# Altium PCB 2018.PcbDoc
Units mm, origin at the board's own origin, x right, y up, seen from the top; angles counter-clockwise.
Board outline 99 x 31 mm, 4 copper layers (Top Layer, Ground, Power, Bottom Layer), stack 0.558 mm thick; 49 components, 37 nets, 163 pads, 31 vias.
Unrouted connection lines stored in the file: 13.
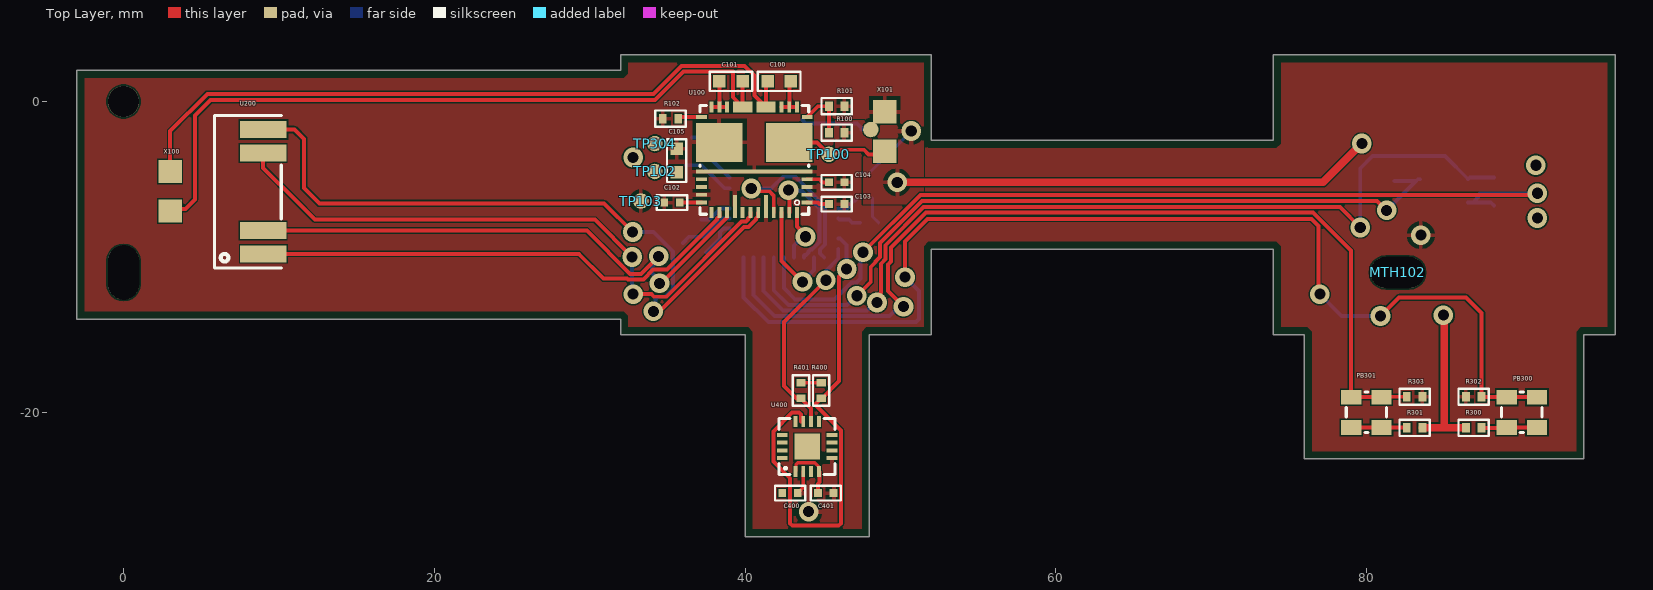
[diagram p0: Top Layer view]
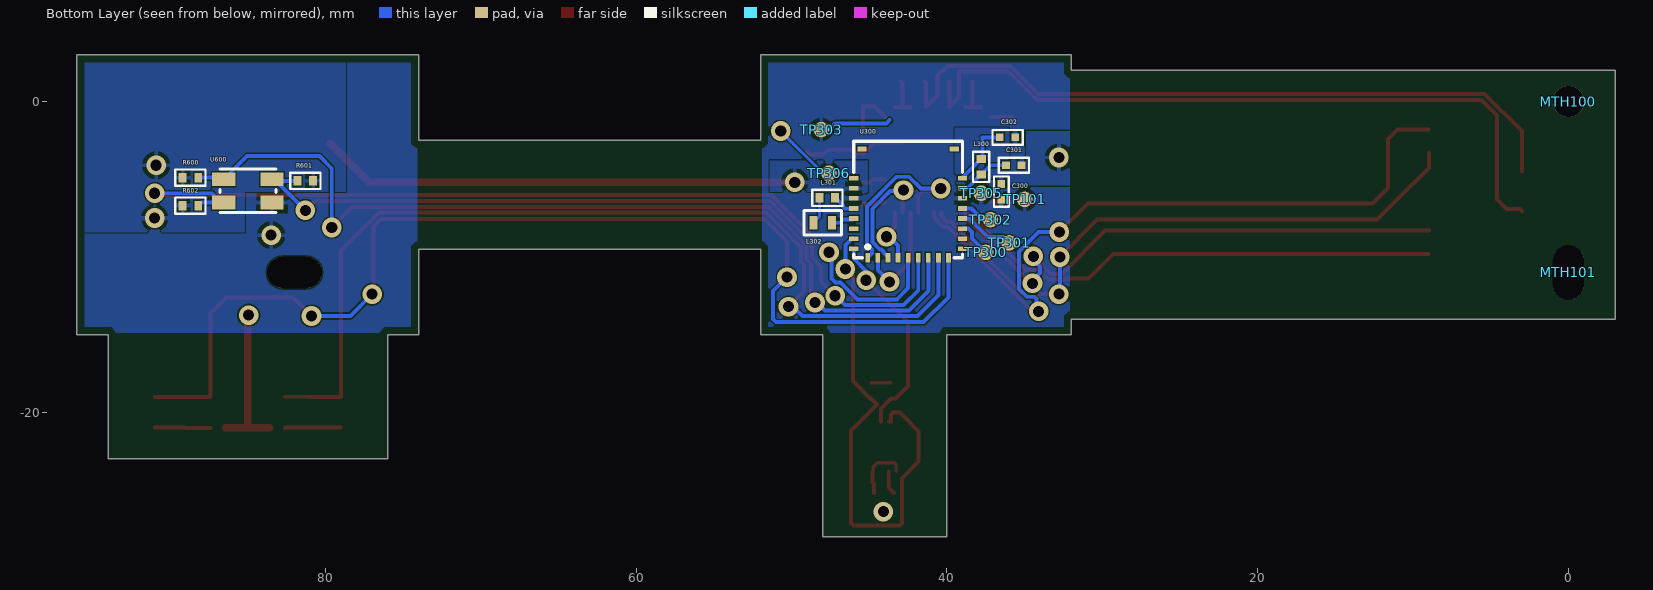
[diagram p1: Bottom Layer view, seen from below]
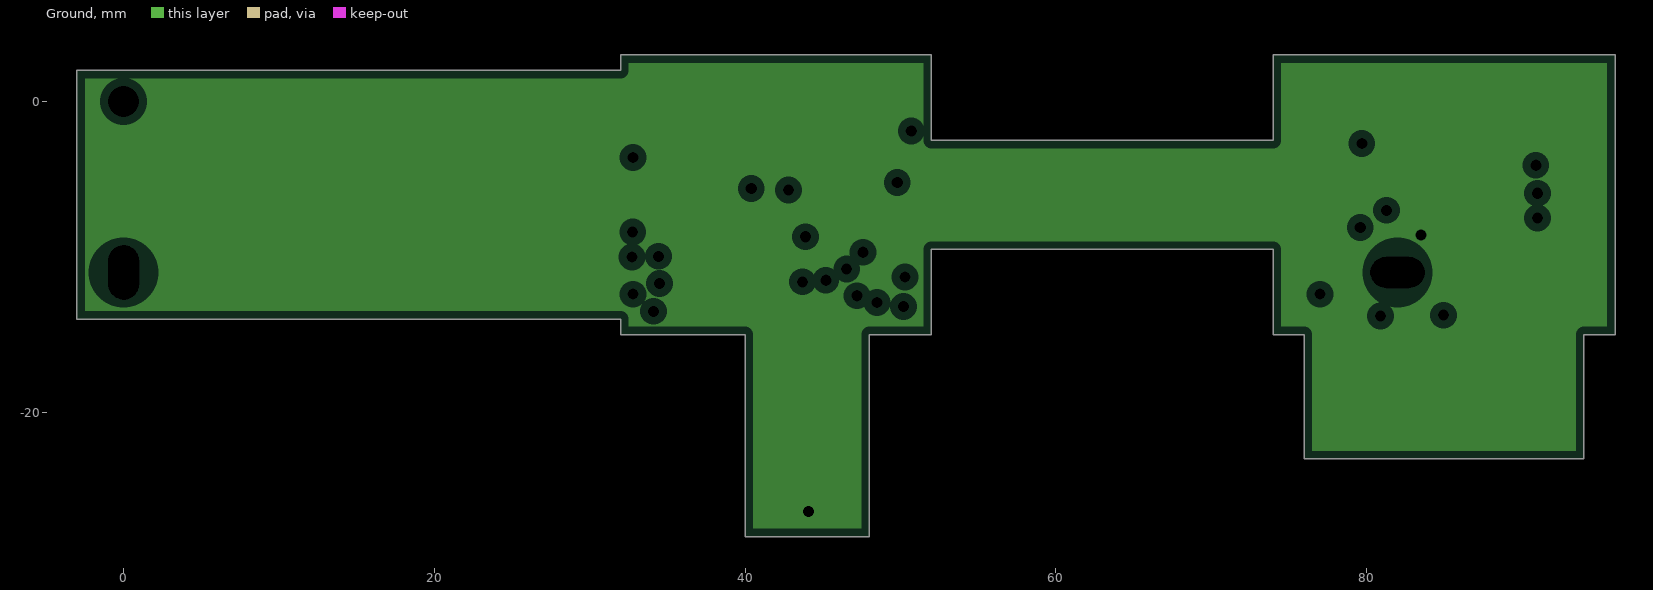
[diagram p2: Ground, clearances drawn from the general rule]
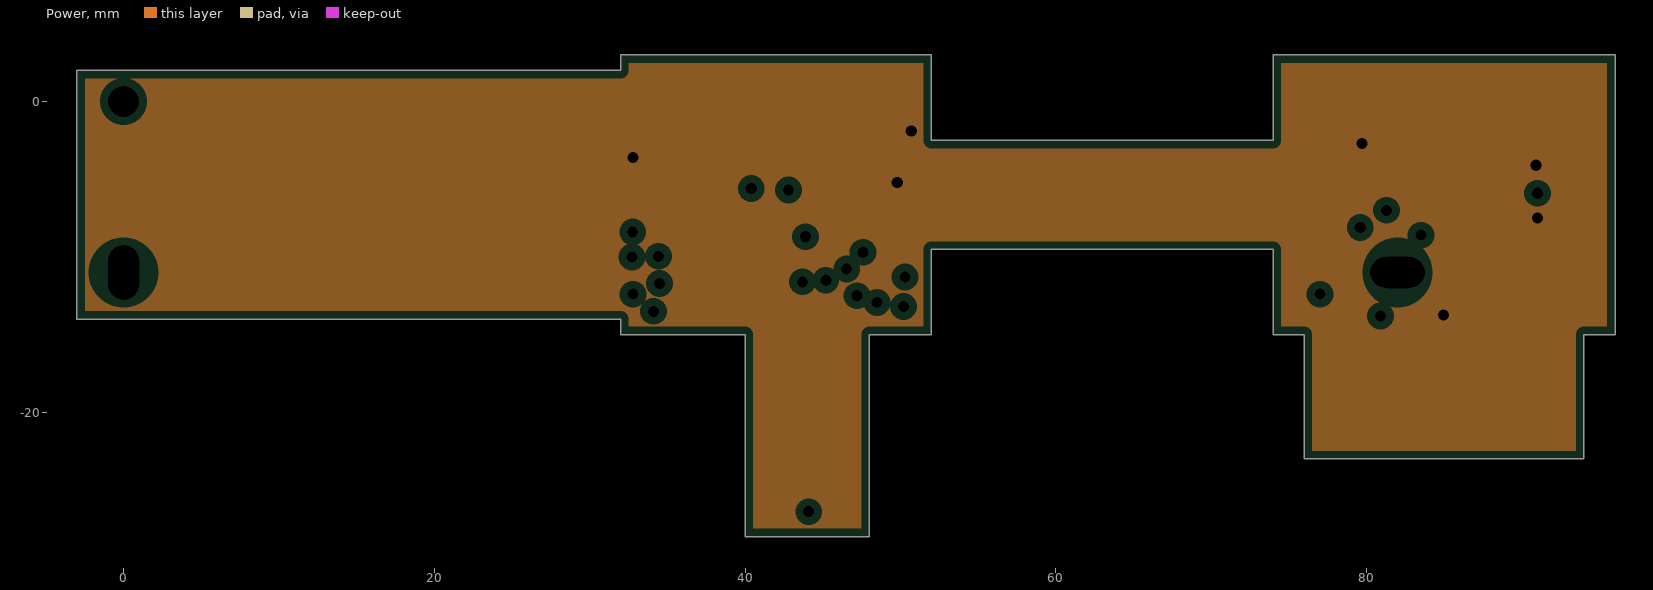
[diagram p3: Power, clearances drawn from the general rule]
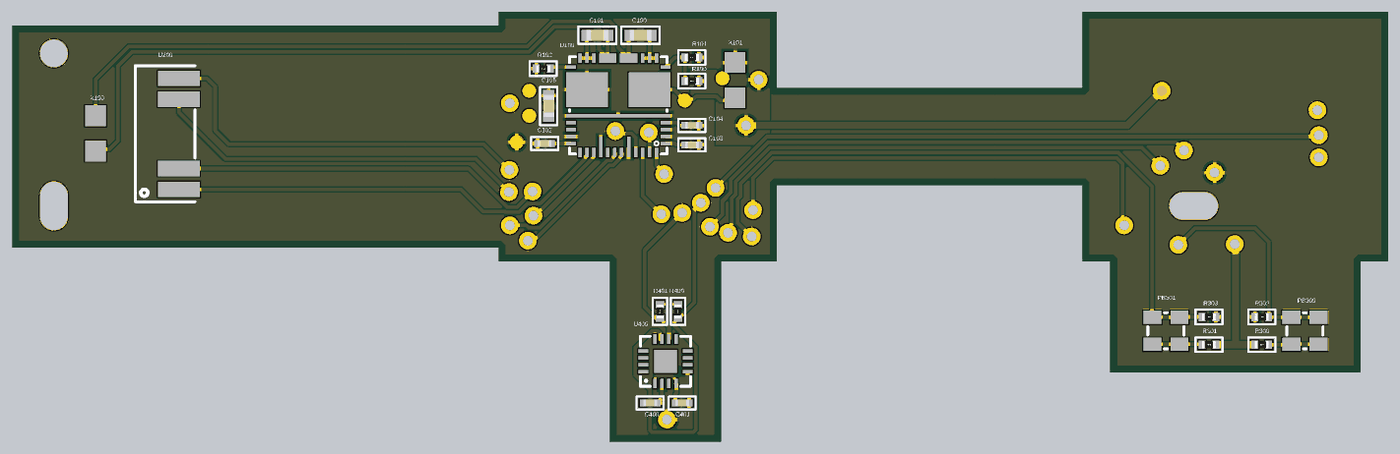
[diagram p4: 3D render of the assembled board from above, using the file's embedded part models]
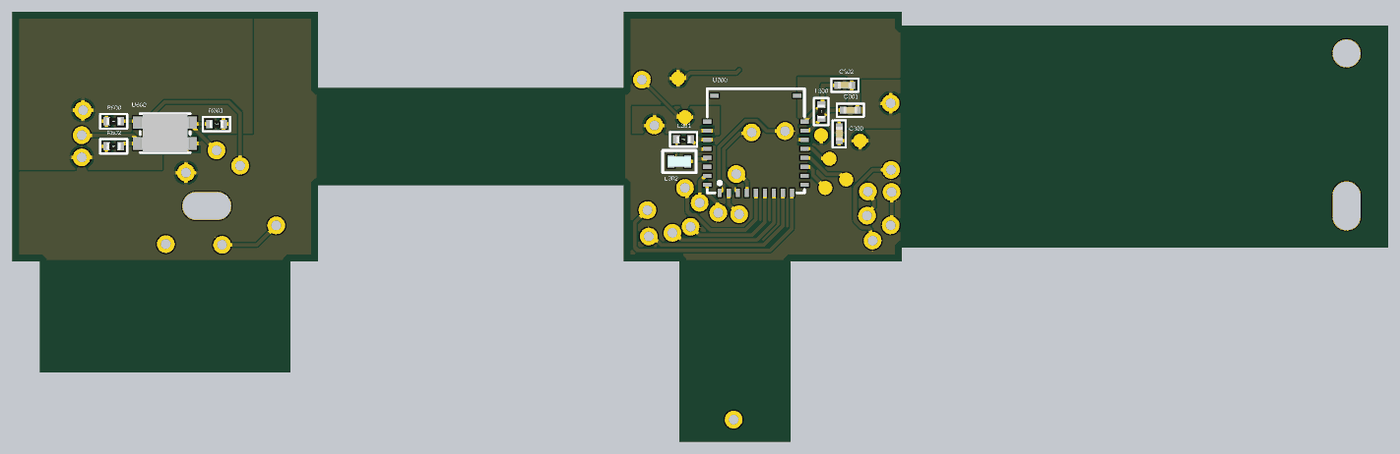
[diagram p5: 3D render of the assembled board from below, using the file's embedded part models]

## Layer stack, top to bottom
Top Solder 1: solder mask 0.018, Solder Resist, Dk 3.5
Top Solder 1: solder mask 0.018, SM-001, Dk 3.5
Top Layer: signal copper 0.0262
Dielectric 2: prepreg 0.128, PP-006, Dk 4.1
Ground: plane copper 0.0062, net GND
Dielectric 1: core 0.237, FR-4, Dk 4.8
Power: plane copper 0.0062, net +3V3
Dielectric 3: prepreg 0.128, PP-006, Dk 4.1
Bottom Layer: signal copper 0.0262
Bottom Solder: solder mask 0.018, SM-001, Dk 3.5
Bottom Solder: solder mask 0.018, Solder Resist, Dk 3.5

## Board outline
74,-15 76,-15 76,-23 94,-23 94,-15 96,-15 96,3 74,3 74,-2.5 52,-2.5 52,3 32,3 32,2 -3,2 -3,-14 32,-14 32,-15 40,-15 40,-28 48,-28 48,-15 52,-15 52,-9.5 74,-9.5
board region A: 32,-14 -3,-14 -3,2 32,2
board region C: 48,-15 48,-28 40,-28 40,-15
board region B: 74,-9.5 52,-9.5 52,-2.5 74,-2.5
board region A: 52,-15 32,-15 32,3 52,3
board region D: 94,-15 94,-23 76,-23 76,-15
board region B: 74,-15 74,3 96,3 96,-15

## Design rules (kind name [scope] priority, off if disabled: settings)
Clearance [All] p1: gap=0.1 ignorepadtopadclearanceinfootprint=TRUE except(0: Arc-Hole Track-Hole SMDPad-Hole THPad-Hole Via-Hole Fill-Hole Poly-Hole Region-Hole Text-Hole)
DiffPairsRouting [All] p1: maxlimit=0.2 minlimit=0.2 mostfreqgap=0.2 toplayer_minwidth=0.15 toplayer_maxwidth=0.15 toplayer_prefwidth=0.15 bottomlayer_minwidth=0.15 bottomlayer_maxwidth=0.15 bottomlayer_prefwidth=0.15 substack1={D68A770C-9D71-481F-A7CE-77609AFA4C40} toplayer_{d68a770c-9d71-481f-a7ce-77609afa4c40}_minwidth=0.381 toplayer_{d68a770c-9d71-481f-a7ce-77609afa4c40}_maxwidth=0.381 toplayer_{d68a770c-9d71-481f-a7ce-77609afa4c40}_prefwidth=0.381 bottomlayer_{d68a770c-9d71-481f-a7ce-77609afa4c40}_minwidth=0.381 bottomlayer_{d68a770c-9d71-481f-a7ce-77609afa4c40}_maxwidth=0.381 bottomlayer_{d68a770c-9d71-481f-a7ce-77609afa4c40}_prefwidth=0.381 maxuncoupledlength=12.7
PlaneClearance [All] p1: clearance=0.508
PlaneConnect [All] p1: planeconnectstyle=Relief reliefexpansion=0.508 reliefentries=4 reliefconductorwidth=0.254 reliefairgap=0.254
PolygonConnect [All] p1: connectstyle=Relief reliefconductorwidth=0.254 reliefentries=4 polygonreliefangle="90 Angle" airgapwidth=0.254
RoutingVias [All] p1: holewidth=0.711 width=1.27 viastyle="Through Hole" minholewidth=0.711 minwidth=1.27 maxholewidth=0.711 maxwidth=1.27
SilkToSilkClearance [All] p1: silktosilkclearance=0.1
SolderMaskExpansion [All] p1: expansion=0.102 istentingtop=FALSE
UnpouredPolygon UnpouredPolygon_1 [All] p1:
Width [All] p1: maxlimit=0.5 minlimit=0.2 preferedwidth=0.254 substack1={D68A770C-9D71-481F-A7CE-77609AFA4C40}
25 further rules are at their usual default settings.

## Components (designator, comment, footprint, x,y, rotation, side; value= is the part's Value field where it differs from the comment)
C100 "10nF" C0603 42.2,1.3 r0 top
C101 "10nF" C0603 39.1,1.3 r180 top
C102 "100nF" C0402 35.3,-6.5 r180 top
C103 "100nF" C0402 45.9,-6.6 r0 top
C104 "100nF" C0402 45.9,-5.2 r0 top
C105 "4.7uF" C0603 35.6,-3.8 r270 top
C300 "100nF" C0402 36.5,-5.8 r90 bottom
C301 "DNP" C0402 35.7,-4.1 r0 bottom
C302 "1pF" C0402 36.1,-2.3 r0 bottom
C400 "100nF" C0402 42.9,-25.2 r180 top
C401 "100nF" C0402 45.2,-25.2 r180 top
L300 "1.1nH" L0402 37.8,-4.2 r90 bottom
L301 "10nH" L0402 47.7,-6.2 r180 bottom
L302 "10uH" L0603 48,-7.8 r180 bottom
MTH100 "MTH_2mmx2mm" MTH_2mmx2mm 0,0 r90 bottom
MTH101 "MTH_2mmx3.5mm" MTH_2mmx3.5mm 0,-11 r90 bottom
MTH102 "MTH_2mmx3.5mm" MTH_2mmx3.5mm 82,-11 r0 top
PB300 "TIE2018_PB" PB 90,-20 r90 top
PB301 "TIE2018_PB" PB 80,-20 r90 top
R100 "10K" R0402 45.9,-2 r0 top
R101 "10K" R0402 45.9,-0.3 r180 top
R102 "3.83k" R0402 35.2,-1.1 r0 top
R300 "4k7" R0402 86.9,-21 r180 top
R301 "10K" R0402 83.1,-21 r0 top
R302 "4k7" R0402 86.9,-19 r0 top
R303 "4k7" R0402 83.1,-19 r180 top
R400 "10K" R0402 44.9,-18.6 r90 top
R401 "10K" R0402 43.6,-18.6 r90 top
R600 "100" R0402 88.7,-4.9 r0 bottom
R601 "100" R0402 81.3,-5.1 r180 bottom
R602 "100" R0402 88.7,-6.7 r0 bottom
TP100 "Test_Point_3" TestPoint#1 45.4,-3.4 r90 top
TP101 "Test_Point_3" TestPoint#1 35,-6.3 r90 bottom
TP102 "Test_Point_3" TestPoint#1 34.2,-4.5 r90 top
TP103 "Test_Point_3" TestPoint#1 33.3,-6.4 r90 top
TP300 "Test_Point_3" TestPoint#1 37.5,-9.7 r90 bottom
TP301 "Test_Point_3" TestPoint#1 36,-9.1 r90 bottom
TP302 "Test_Point_3" TestPoint#1 37.2,-7.6 r90 bottom
TP303 "Test_Point_3" TestPoint#2 48.1,-1.8 r90 bottom
TP304 "Test_Point_3" TestPoint#3 34.2,-2.7 r90 bottom
TP305 "Test_Point_3" TestPoint#1 37.8,-5.9 r90 bottom
TP306 "Test_Point_3" TestPoint#1 47.6,-4.6 r90 bottom
U100 "TIE_2018_WPC_AFE" WPC_AFE 44,-6.5 r180 top
U200 "DCM03" DMC03 8,-5.8 r90 top
U300 "TIE2018_SoC" SoC 42.5,-6.55 r180 bottom
U400 "TIE2018_DIG_MIC_GYRO" DIGI_MIC_GYRO 44,-22.2 r90 top
U600 "TIE2018_RGY" SMP4-RGY 85,-5.75 r270 bottom
X100 "PADS_1.5x1.5mm" PADS_1.5x1.5mm 3,-4.5 r0 top
X101 "PADS_1.5x1.5mm" PADS_1.5x1.5mm 49,-3.2 r180 top

## Footprints (in the part's own frame and the unit in brackets; to place one, negate y for a bottom-side part, rotate by r counter-clockwise, add the part's x,y. Pads: shape width x height; smd on the part's side, far side on the other; paste and mask are expansions set on the pad)
C0402 [mm] "Guidelines for Footprint Design - Walsin Technology Corporation"
  rect 0.5x0.5 smd: 1(-0.5,0) 2(0.5,0)
  silkscreen extent -0.97,-0.48 0.98,0.48, body extent -0.5,-0.25 0.5,0.25, height 0.48
C0603 [mm] "Guidelines for Footprint Design - Walsin Technology Corporation"
  rect 0.8x0.8 smd: 1(-0.75,0) 2(0.75,0)
  silkscreen extent -1.38,-0.62 1.37,0.63, body extent -0.8,-0.4 0.8,0.4, height 0.79
DIGI_MIC_GYRO [mm]
  rect 0.7x0.25 smd: 1(-1.6,0.75) 2(-1.6,0.25) 3(-1.6,-0.25) 4(-1.6,-0.75) 9(1.6,-0.75) 10(1.6,-0.25) 11(1.6,0.25) 12(1.6,0.75)
  rect 0.25x0.7 smd: 5(-0.75,-1.6) 6(-0.25,-1.6) 7(0.25,-1.6) 8(0.75,-1.6) 13(0.75,1.6) 14(0.25,1.6) 15(-0.25,1.6) 16(-0.75,1.6)
  rect 1.65x1.65 smd: 17(0,0)
  silkscreen extent -1.8,-1.8 1.8,1.8, body extent -1.8,-1.8 1.8,1.8, height 0.8
DMC03 [mm]
  rect 1.1x3 smd: 1(-4,-1) 2(-2.503,-0.983) 3(2.49,-0.983) 4(4,-1)
  silkscreen extent -4.9,-2.15 4.9,2.15, body extent -4.9,-2.2 4.9,2.1, height 1
L0402 [mm]
  rect 0.5x0.6 smd: 1(-0.5,0) 2(0.5,0)
  silkscreen extent -0.98,-0.53 0.97,0.52, body extent -0.5,-0.25 0.5,0.25, height 0.34
L0603 [mm]
  rect 0.5x0.9 smd: 1(-0.6,0) 2(0.6,0)
  silkscreen extent -1.2,-0.8 1.2,0.8, body extent -0.81,-0.36 0.81,0.37, height 0.87
MTH_2mmx2mm [mm]
  round 2 hole 2: MTH_2mmx2mm(0,0)
MTH_2mmx3.5mm [mm]
  oval 3.5x2 hole 2 slot 3.5 at 0 deg: MTH_2mmx3.5mm(0,0)
PADS_1.5x1.5mm [mm]
  rect 1.5x1.5 smd: 1(0,0) 2(0,-2.54)
PB [mm]
  rect 0.95x1.3 smd: 1(0.975,-0.975) 1(0.975,0.975) 2(-0.975,-0.975) 2(-0.975,0.975)
  silkscreen extent -1.3,-1.3 1.3,1.3, body extent -1.25,-1.25 1.25,1.25, height 1.5
R0402 [mm] "Guidelines for Footprint Design - Walsin Technology Corporation"
  rect 0.5x0.6 smd: 1(-0.5,0) 2(0.5,0)
  silkscreen extent -0.98,-0.53 0.97,0.53, body extent -0.5,-0.25 0.5,0.25, height 0.34
SMP4-RGY [mm]
  rect 0.9x1.5 smd: 1(-0.75,1.55) 2(-0.75,-1.55) 3(0.75,1.55) 4(0.75,-1.55)
  silkscreen extent -1.4,-1.8 1.4,1.8, body extent -1.4,-1.75 1.4,1.75, height 1.9
SoC [mm]
  rect 0.3x0.6 smd: 1(-2.6,-3.498) 2(-1.95,-3.498) 3(-1.3,-3.498) 4(-0.65,-3.498) 5(0,-3.498) 6(0.65,-3.498) 7(1.3,-3.498) 8(1.95,-3.498) 9(2.6,-3.498)
  rect 0.6x0.3 smd: 10(3.5,-2.927) 11(3.5,-2.277) 12(3.5,-1.628) 13(3.5,-0.977) 14(3.5,-0.327) 15(3.5,0.322) 16(3.5,0.972) 17(3.5,1.623) 18(-3.5,1.623) 19(-3.5,0.972) 20(-3.5,0.322) 21(-3.5,-0.327) 22(-3.5,-0.977) 23(-3.5,-1.628) 24(-3.5,-2.277) 25(-3.5,-2.927) 26(-2.975,3.497) 27(2.975,3.497)
  silkscreen extent -3.5,-3.5 3.5,4, body extent -3.5,-3.5 3.5,4, height 0.4
TestPoint#1 [mm]
  round 1 smd paste-10 mask+0.1: 1(0,0)
TestPoint#2 [mm]
  round 1 all layers, no hole paste-10 mask+0.1: 1(0,0)
TestPoint#3 [mm]
  round 1 smd far side paste-10 mask+0.1: 1(0,0)
WPC_AFE [mm]
  rect 0.7x0.25 smd: 1(0,0) 2(0,-0.5) 3(0,-1) 4(0,-1.5) 12(-0.004,-5.5) 25(6.8,-5.5) 33(6.8,-1.5) 34(6.8,-1) 35(6.8,-0.5) 36(6.8,0)
  rect 3x2.5 smd: 5(1.15,-3.875) 26(5.65,-3.875)
  rect 0.25x0.7 smd: 13(0.65,-6.15) 14(1.15,-6.15) 15(1.65,-6.15) 22(5.15,-6.15) 23(5.65,-6.15) 24(6.15,-6.15) 37(6.149,0.65) 38(5.65,0.65) 39(5.15,0.65) 41(4.15,0.65) 42(3.646,0.65) 43(3.15,0.65) 45(2.15,0.65) 46(1.65,0.65) 47(1.15,0.65) 48(0.65,0.65)
  rect 1.25x0.7 smd: 16(2.65,-6.15) 19(4.15,-6.15)
  rect 7.5x0.25 smd: 32(3.4,-2)
  rect 0.25x1.5 smd: 40(4.65,0.25) 44(2.65,0.25)
  silkscreen extent -0.1,-6.25 6.9,0.75, body extent -0.1,-6.25 6.9,0.75, height 0.5

## Part data
C100 C101: library part C0603X103F3GACTU, "Cap, 0.01ΜF, 25V, 1%, C0G/NP0, 0603", Manufacturer=KEMET, Supplier Part Number 1=69AC2632, Category=Capacitors, Manufacturer Part Number=C0603X103F3GACTU, Pricing 1="1=2.42000, 10=1.96000, 25=1.81000, 50=1.65000, 100=1.50000 (USD)", RoHS=Yes, RoHS Compliant=Yes, Stock 1=210, Supplier 1=Newark
C102 C103 C104 C300 C400 C401: library part 939113424610-T3N, "Silicon Capacitor 100nF 11VDC 0402", Manufacturer=Murata, Category=Capacitors, Manufacturer Part Number=939113424610-T3N, Pricing 1="1000=6.60300, 2000=6.41700, 4000=6.23100, 6000=6.04500, 8000=5.85900 (USD)", RoHS=No, Supplier 1=Avnet, Supplier Part Number 1=939113424610-T3N
C105: library part C1608X5R1V475M080AC, "C Series 0603 4.7 uF 35 V ±20 % Tolerance X5R SMT Multilayer Ceramic Capacitor", Case Code (Imperial)=0603, Case Code (Metric)=1608, Dielectric=X5R, Dielectric Material=Ceramic, Manufacturer=TDK, Max Operating Temperature=85°C, Min Operating Temperature=-55°C, Package Quantity=1, Tolerance=20%, Voltage Rating=35V, Capacitance=4.7uF, Case/Package=0603, Category="Ceramic Capacitors", ComponentLink1Description=https://datasheet.ciiva.com/24218/mlcc-commercial-general-en-24218312.pdf?src-supplier=Mouser, ComponentLink1URL=https://datasheet.ciiva.com/24218/mlcc-commercial-general-en-24218312.pdf?src-supplier=Mouser, Depth=0.8mm, Height=0.8mm, Lead Free="Lead Free", Length=1.6mm, Manufacturer Part Number=C1608X5R1V475M080AC, Mount="Surface Mount", Packaging="Tape and Reel", Pricing 1="1=0.42890, 10=0.23670, 25=0.23340, 50=0.22950, 100=0.18270, 250=0.18070, 500=0.13610, 1000=0.11450, 3000=0.11340 (USD)", REACH SVHC="No SVHC", Resistor Type=Ceramic, RoHS=Yes, RoHS Compliant=Yes, Series=C, Stock 1=2450, Supplier 1="Arrow Electronics", Supplier Part Number 1=C1608X5R1V475M080AC, Termination=SMD/SMT, Thickness=0.039inch, Voltage Rating (DC)=35V, Weight=7.1E-05oz, Width=0.031inch
C301: library part 0402ZC101MAT2A, "Cap Ceramic 100pF 10V X7R 20% SMD 0402 125°C Paper T/R", Capacitance=100pF, Case Code (Imperial)=0402, Case Code (Metric)=1005, Dielectric=X7R, Manufacturer="Kyocera AVX", Max Operating Temperature=125°C, Min Operating Temperature=-55°C, Package Quantity=10000, Tolerance=20%, Voltage Rating=10V, Case/Package=0402, Category="Ceramic Capacitors", ComponentLink1Description=https://datasheet.ciiva.com/5419/cx7r-218113-5419800.pdf?src-supplier=Mouser, ComponentLink1URL=https://datasheet.ciiva.com/5419/cx7r-218113-5419800.pdf?src-supplier=Mouser, ComponentLink2Description=https://datasheet.ciiva.com/206/cx7r-206063.pdf?src-supplier=Digi-Key, ComponentLink2URL=https://datasheet.ciiva.com/206/cx7r-206063.pdf?src-supplier=Digi-Key, Construction=Flat, Depth=0.5mm, Length=1mm, Manufacturer Part Number=0402ZC101MAT2A, Mount="Surface Mount", Number of Pins=2, Packaging="Tape and Reel", Pricing 1="10000=0.04060, 20000=0.04200, 40000=0.03864, 60000=0.03766, 80000=0.03668, 100000=0.03570, 1000000=0.03472 (USD)", RoHS=Yes, RoHS Compliant=Yes, Stock 1=320000, Supplier 1=Avnet, Supplier Part Number 1=0402ZC101MAT2A, Termination=SMD/SMT, Thickness=0.022inch, Voltage Rating (DC)=10V, Width=0.5mm
C302: library part GCM1555C1H1R0CA16J, "Cap Ceramic 1pF 50V C0G 0.25pF Pad SMD 0402 125C Automotive T/R", Case Code (Imperial)=0402, Case Code (Metric)=1005, Dielectric=C0G, Manufacturer=Murata, Max Operating Temperature=125°C, Min Operating Temperature=-55°C, Package Quantity=50000, Ratings=AEC-Q200, Voltage Rating=50V, Capacitance=1pF, Case/Package=0402, Category="Ceramic Capacitors", ComponentLink1Description=http://www.mouser.com/ds/2/281/c03e-806517.pdf?src-supplier=Mouser, ComponentLink1URL=http://www.mouser.com/ds/2/281/c03e-806517.pdf?src-supplier=Mouser, ComponentLink2Description=https://search.murata.co.jp/Ceramy/image/img/A01X/G101/ENG/GCM1555C1H1R0CA16-01.pdf?src-supplier=Digi-Key, ComponentLink2URL=https://search.murata.co.jp/Ceramy/image/img/A01X/G101/ENG/GCM1555C1H1R0CA16-01.pdf?src-supplier=Digi-Key, ComponentLink3Description=http://www.murata.com/~/media/webrenewal/support/library/catalog/products/capacitor/mlcc/c03e.ashx?src-supplier=Digi-Key, ComponentLink3URL=http://www.murata.com/~/media/webrenewal/support/library/catalog/products/capacitor/mlcc/c03e.ashx?src-supplier=Digi-Key, Height=0.5mm, Length=0.039inch, Manufacturer Part Number=GCM1555C1H1R0CA16J, Mount="Surface Mount", Packaging="Tape and Reel", Pricing 1="1=0.06050, 10=0.03030, 25=0.03000, 100=0.01940, 250=0.01910, 500=0.01350, 1000=0.01080, 3000=0.00950, 6000=0.00890, 15000=0.00840, 30000=0.00830, 75000=0.00820, 150000=0.00810 (USD)", RoHS=Yes, Stock 1=268213, Supplier 1="Arrow Electronics", Supplier Part Number 1=GCM1555C1H1R0CA16J, Termination=SMD/SMT, Thickness=0.022inch, Voltage Rating (DC)=50V, Weight=0.000212oz, Width=0.02inch
L300: library part LQG15WZ1N1C02D, "Inductor RF Chip Unshielded Multi-Layer 0.0011uH 0.2nH 100MHz Air 1.2A 0.03Ohm DCR 0402 Automotive T/R", Case Code (Imperial)=0402, Case Code (Metric)=1005, Current Rating=1.2A, DC Resistance (DCR)=30mR, Manufacturer=Murata, Max Operating Temperature=125°C, Min Operating Temperature=-55°C, Ratings=AEC-Q200, Self Resonant Frequency=14GHz, Test Frequency=100MHz, Case/Package=0402, Category="Fixed Inductors", ComponentLink1Description=http://search.murata.co.jp/Ceramy/image/img/P02/JELF243B-9117.pdf?src-supplier=Digi-Key, ComponentLink1URL=http://search.murata.co.jp/Ceramy/image/img/P02/JELF243B-9117.pdf?src-supplier=Digi-Key, ComponentLink2Description=https://search.murata.co.jp/Ceramy/image/img/P02/JELF243B-9117.pdf?src-supplier=Digi-Key, ComponentLink2URL=https://search.murata.co.jp/Ceramy/image/img/P02/JELF243B-9117.pdf?src-supplier=Digi-Key, Core Material=Air, Inductance=1.1nH, Manufacturer Part Number=LQG15WZ1N1C02D, Mount="Surface Mount", Packaging="Tape and Reel", Pricing 1="1=0.04140, 10=0.04070, 25=0.04000, 100=0.03950, 250=0.03880, 500=0.03830, 1000=0.03760, 3000=0.03700, 6000=0.03640 (USD)", RoHS=Yes, RoHS Compliant=Yes, Shielding=Unshielded, Stock 1=6887, Supplier 1="Arrow Electronics", Supplier Part Number 1=LQG15WZ1N1C02D
L301: library part MHQ1005P10NJT000, "Inductor High Frequency Chip Unshielded Multi-Layer 0.01uH 5% 100MHz 23Q-Factor Ceramic 0.5A 0.19Ohm DCR 0402 T/R", Case Code (Imperial)=0402, Case Code (Metric)=1005, Current Rating=500mA, DC Resistance (DCR)=190mR, Inductance Tolerance=5%, Manufacturer=TDK, Max Operating Temperature=125°C, Min Operating Temperature=-55°C, Package Quantity=10000, Self Resonant Frequency=3.3GHz, Test Frequency=100MHz, Case/Package=0402, Category="Fixed Inductors", ComponentLink1Description=https://datasheet.ciiva.com/29683/inductor-commercial-high-frequency-mhq-en-29683658.pdf?src-supplier=Digi-Key, ComponentLink1URL=https://datasheet.ciiva.com/29683/inductor-commercial-high-frequency-mhq-en-29683658.pdf?src-supplier=Digi-Key, ComponentLink2Description=https://datasheet.ciiva.com/29683/inductor-commercial-high-frequency-mhq-en-29683659.pdf?src-supplier=Digi-Key, ComponentLink2URL=https://datasheet.ciiva.com/29683/inductor-commercial-high-frequency-mhq-en-29683659.pdf?src-supplier=Digi-Key, ComponentLink3Description=https://datasheet.ciiva.com/29683/inductor-commercial-high-frequency-mhq-en-29683660.pdf?src-supplier=Digi-Key, ComponentLink3URL=https://datasheet.ciiva.com/29683/inductor-commercial-high-frequency-mhq-en-29683660.pdf?src-supplier=Digi-Key, Core Material=Non-Magnetic, Height - Seated (Max)=0.024inch, Inductance=10nH, Length=0.039inch, Manufacturer Part Number=MHQ1005P10NJT000, Max DC Current=500mA, Mount="Surface Mount", Packaging="Tape and Reel", Pricing 1="1=0.17480, 10=0.12050, 25=0.11830, 100=0.09750, 250=0.09360, 500=0.08470, 1000=0.07090, 3000=0.05930, 6000=0.05690 (USD)", RoHS=Yes, RoHS Compliant=Yes, Shielding=Unshielded, Stock 1=9027, Supplier 1="Arrow Electronics", Supplier Part Number 1=MHQ1005P10NJT000, Tolerance=5%, Width=0.02inch
L302: library part LQM18FN100M00D, "0603 10uH ±20% DCR=0.9Ω 50mA SRF=30MHz", Case Code (Imperial)=0603, Case Code (Metric)=1608, Current Rating=50mA, DC Resistance (DCR)=1.17R, Manufacturer=Murata, Max Operating Temperature=125°C, Min Operating Temperature=-55°C, Package Quantity=4000, Self Resonant Frequency=30MHz, Test Frequency=1MHz, Tolerance=20%, Case/Package=0603, Category="Fixed Inductors", ComponentLink1Description=https://datasheet.ciiva.com/11799/0900766b80f15512-11799471.pdf?src-supplier=RSComponents, ComponentLink1URL=https://datasheet.ciiva.com/11799/0900766b80f15512-11799471.pdf?src-supplier=RSComponents, ComponentLink2Description=https://datasheet.ciiva.com/3865/286lqm18fn100m0023-3865365.pdf?src-supplier=Arrow+Electronics, ComponentLink2URL=https://datasheet.ciiva.com/3865/286lqm18fn100m0023-3865365.pdf?src-supplier=Arrow+Electronics, ComponentLink3Description=https://datasheet.ciiva.com/1039/l0075s0097lqm18f-1039418.pdf?src-supplier=Digi-Key, ComponentLink3URL=https://datasheet.ciiva.com/1039/l0075s0097lqm18f-1039418.pdf?src-supplier=Digi-Key, ComponentLink4Description=https://datasheet.ciiva.com/1039/l0075s0097lqm18f-1039417.pdf?src-supplier=Digi-Key, ComponentLink4URL=https://datasheet.ciiva.com/1039/l0075s0097lqm18f-1039417.pdf?src-supplier=Digi-Key, ComponentLink5Description=https://datasheet.ciiva.com/1039/l0075s0097lqm18f-1039419.pdf?src-supplier=Digi-Key, ComponentLink5URL=https://datasheet.ciiva.com/1039/l0075s0097lqm18f-1039419.pdf?src-supplier=Digi-Key, ComponentLink6Description=https://datasheet.ciiva.com/8510/l0075s0097lqm18f-8510087.pdf?src-supplier=Avnet, ComponentLink6URL=https://datasheet.ciiva.com/8510/l0075s0097lqm18f-8510087.pdf?src-supplier=Avnet, ComponentLink7Description=https://datasheet.ciiva.com/8510/l0075s0097lqm18f-8510328.pdf?src-supplier=Avnet, ComponentLink7URL=https://datasheet.ciiva.com/8510/l0075s0097lqm18f-8510328.pdf?src-supplier=Avnet, Core Material=Ferrite, DC Current=50mA, Depth=0.9mm, Height=0.9mm, Height - Seated (Max)=0.035inch, Inductance=10uH, Lead Free="Lead Free", Length=0.063inch, Manufacturer Part Number=LQM18FN100M00D, Max DC Current=50mA, Military Standard=Not, Mount="Surface Mount", Packaging="Tape and Reel", Pricing 1="1=0.15720, 10=0.10770, 25=0.09610, 100=0.08640, 250=0.08260, 500=0.08180, 1000=0.07310, 3000=0.07220 (USD)", Radiation Hardening=No, RoHS=Yes, RoHS Compliant=Yes, Saturation Current=50mA, Series=LQM18F, Shielding=Shielded, Stock 1=3450, Supplier 1="Arrow Electronics", Supplier Part Number 1=LQM18FN100M00D, Termination=SMD/SMT, Width=0.031inch
PB300 PB301: library part Push_Button
R100 R301 R400 R401: library part CR0402-FX-1002GLF, "Res Thick Film 0402 10K Ohm 1% 1/16W ±100ppm/°C Molded SMD SMD Paper Tape on Plastic Reel", Case Code (Imperial)=0402, Case Code (Metric)=1005, Manufacturer=Bourns, Max Operating Temperature=125°C, Max Power Dissipation=63mW, Min Operating Temperature=-55°C, Package Quantity=10000, Power Rating=62.5mW, Resistance=10kR, Resistance Tolerance=1%, Resistor Type="Thick Film", Temperature Coefficient=100ppm/°C, Voltage Rating=50V, Case/Package=0402, Category="Chip SMD Resistors", ComponentLink1Description=https://datasheet.ciiva.com/30490/0900766b812730ae-30490501.pdf?src-supplier=RSComponents, ComponentLink1URL=https://datasheet.ciiva.com/30490/0900766b812730ae-30490501.pdf?src-supplier=RSComponents, ComponentLink2Description=https://datasheet.ciiva.com/22713/659744-22713205.pdf?src-supplier=Element14, ComponentLink2URL=https://datasheet.ciiva.com/22713/659744-22713205.pdf?src-supplier=Element14, ComponentLink3Description=https://datasheet.ciiva.com/22644/659744-22644166.pdf?src-supplier=Element14, ComponentLink3URL=https://datasheet.ciiva.com/22644/659744-22644166.pdf?src-supplier=Element14, ComponentLink4Description=https://datasheet.ciiva.com/6562/cr0402-6562871.pdf?src-supplier=Digi-Key, ComponentLink4URL=https://datasheet.ciiva.com/6562/cr0402-6562871.pdf?src-supplier=Digi-Key, ComponentLink5Description=https://datasheet.ciiva.com/6562/cr0402-6562873.pdf?src-supplier=Digi-Key, ComponentLink5URL=https://datasheet.ciiva.com/6562/cr0402-6562873.pdf?src-supplier=Digi-Key, ComponentLink6Description=https://datasheet.ciiva.com/7606/1896412-7606203.pdf?src-supplier=Newark, ComponentLink6URL=https://datasheet.ciiva.com/7606/1896412-7606203.pdf?src-supplier=Newark, ComponentLink7Description=https://datasheet.ciiva.com/3255/cr0402-3255916.pdf?src-supplier=Avnet, ComponentLink7URL=https://datasheet.ciiva.com/3255/cr0402-3255916.pdf?src-supplier=Avnet, ComponentLink8Description=https://datasheet.ciiva.com/30133/cr0402-30133006.pdf?src-supplier=Onlinecomponents.com, ComponentLink8URL=https://datasheet.ciiva.com/30133/cr0402-30133006.pdf?src-supplier=Onlinecomponents.com, ComponentLink9Description=https://datasheet.ciiva.com/6562/cr0402-6562911.pdf?src-supplier=Digi-Key, ComponentLink9URL=https://datasheet.ciiva.com/6562/cr0402-6562911.pdf?src-supplier=Digi-Key, Construction=Rectangular, Contact Plating=Tin, Depth=0.5mm, Height=0.35mm, Length=1mm, Manufacturer Part Number=CR0402-FX-1002GLF, Military Standard=Not, Mount="Surface Mount", Number of Terminations=2, Packaging="Tape and Reel", Pricing 1="1=0.04140, 10=0.01700, 25=0.00880, 100=0.00430, 250=0.00410, 500=0.00360 (USD)", Radiation Hardening=No, REACH SVHC="No SVHC", RoHS=Yes, RoHS Compliant=Yes, Series=CR0402, Stock 1=1909, Supplier 1="Arrow Electronics", Supplier Part Number 1=CR0402-FX-1002GLF, Technology="THICK FILM", Termination=SMD/SMT, Thickness=356um, Tolerance=1%, Voltage Rating (DC)=50V, Width=0.5mm
R101: library part CQ02WGJ0103TCE, Manufacturer="Royal Electronic Factory", Supplier Part Number 1=303-CQ02WGJ0103TCE, Manufacturer Part Number=CQ02WGJ0103TCE, Pricing 1="10000=0.00400 (USD)", RoHS=No, Supplier 1=Mouser
R102: library part CR0402-FX-3831GLF, "Res Thick Film 0402 3.83K Ohm 1% 1/16W 100ppm/C Molded SMD SMD Paper Tape on Plastic Reel", Case/Package=0402, Manufacturer=Bourns, Max Operating Temperature=125°C, Max Power Dissipation=63mW, Min Operating Temperature=-55°C, Package Quantity=10000, Resistance=3.83kR, Resistor Type="Thick Film", Temperature Coefficient=100ppm/°C, Tolerance=1%, Category="Chip SMD Resistors", ComponentLink1Description=https://datasheet.ciiva.com/29522/cr0402-29522207.pdf?src-supplier=Digi-Key, ComponentLink1URL=https://datasheet.ciiva.com/29522/cr0402-29522207.pdf?src-supplier=Digi-Key, Construction=Rectangular, Depth=0.5mm, Height=0.016inch, Length=0.039inch, Manufacturer Part Number=CR0402-FX-3831GLF, Military Standard=Not, Mount="Surface Mount", Number of Terminations=2, Packaging="Tape and Reel", Pricing 1="1=0.03640, 10=0.00620, 25=0.00610, 100=0.00250, 250=0.00230, 1000=0.00140, 6000=0.00130 (USD)", RoHS=Yes, RoHS Compliant=Yes, Series=CR0402, Stock 1=18825, Supplier 1="Arrow Electronics", Supplier Part Number 1=CR0402-FX-3831GLF, Thickness=356um, Width=0.02inch
R300 R302 R303: library part TNPU04024K70BZEP00, "TNPU0402 4K7 0.1% T-16 EP1 E3", Manufacturer="Vishay Dale", Supplier Part Number 1=541-TNPU04024K70BZEP00CT-ND, Category="Chip SMD Resistors", Manufacturer Part Number=TNPU04024K70BZEP00, Pricing 1="1=1.77000, 10=1.56800, 100=1.19710 (USD)", RoHS=No, Stock 1=529, Supplier 1=Digi-Key
R600 R601 R602: library part CR0402-FX-1000GLF, "Res Thick Film 0402 100 Ohm 1% 1/16W ±100ppm/°C Molded SMD SMD Paper Tape on Plastic Reel", Case Code (Imperial)=0402, Case Code (Metric)=1005, Manufacturer=Bourns, Max Operating Temperature=125°C, Max Power Dissipation=63mW, Min Operating Temperature=-55°C, Package Quantity=1, Power Rating=62.5mW, Resistance=100R, Resistance Tolerance=1%, Resistor Type="Thick Film", Temperature Coefficient=100ppm/°C, Voltage Rating=50V, Case/Package=0402, Category="Chip SMD Resistors", ComponentLink1Description=https://datasheet.ciiva.com/30490/0900766b812730ae-30490502.pdf?src-supplier=RSComponents, ComponentLink1URL=https://datasheet.ciiva.com/30490/0900766b812730ae-30490502.pdf?src-supplier=RSComponents, ComponentLink2Description=https://datasheet.ciiva.com/7606/1896412-7606202.pdf?src-supplier=Newark, ComponentLink2URL=https://datasheet.ciiva.com/7606/1896412-7606202.pdf?src-supplier=Newark, ComponentLink3Description=https://datasheet.ciiva.com/9120/cr0402-9120731.pdf?src-supplier=Avnet, ComponentLink3URL=https://datasheet.ciiva.com/9120/cr0402-9120731.pdf?src-supplier=Avnet, ComponentLink4Description=https://datasheet.ciiva.com/9116/cr0402-9116748.pdf?src-supplier=Avnet, ComponentLink4URL=https://datasheet.ciiva.com/9116/cr0402-9116748.pdf?src-supplier=Avnet, ComponentLink5Description=https://datasheet.ciiva.com/6548/cr0402-6548045.pdf?src-supplier=Digi-Key, ComponentLink5URL=https://datasheet.ciiva.com/6548/cr0402-6548045.pdf?src-supplier=Digi-Key, ComponentLink6Description=https://datasheet.ciiva.com/6548/cr0402-6548047.pdf?src-supplier=Digi-Key, ComponentLink6URL=https://datasheet.ciiva.com/6548/cr0402-6548047.pdf?src-supplier=Digi-Key, Contact Plating=Tin, Depth=0.5mm, Height=0.35mm, Length=1mm, Manufacturer Part Number=CR0402-FX-1000GLF, Mount="Surface Mount", Number of Terminations=2, Packaging="Tape and Reel", Pricing 1="1=0.05320, 10=0.01080, 25=0.00900, 100=0.00890, 250=0.00730, 500=0.00620, 1000=0.00610, 3000=0.00600, 6000=0.00360, 15000=0.00190, 30000=0.00140 (USD)", Radiation Hardening=No, REACH SVHC="No SVHC", RoHS=Yes, RoHS Compliant=Yes, Series=CR0402, Stock 1=33734, Supplier 1="Arrow Electronics", Supplier Part Number 1=CR0402-FX-1000GLF, Technology="THICK FILM", Termination=SMD/SMT, Thickness=356um, Tolerance=1%, Voltage Rating (DC)=50V, Width=0.5mm
U100: library part WPC_AFE
U300: library part SoC
U400: library part DIG_MIC_GYRO
U600: library part SMP4-RGY, "LED SMD PLCC4 Tri-Color Red/Green/Yellow Clr Lens 120Deg View Angle", Case/Package=PLCC, Color=Green,Red,Yellow, Forward Current=20mA, Forward Voltage=1.9V, Lens Color=Colorless, Manufacturer=Bivar, Max Operating Temperature=85°C, Min Operating Temperature=-40°C, Package Quantity=2000, Power Rating=72mW, Supplier Part Number 1=73R3964, Category=LEDs, ComponentLink1Description=https://datasheet.ciiva.com/4689/smp4-rgy-66584-4689315.pdf?src-supplier=Mouser, ComponentLink1URL=https://datasheet.ciiva.com/4689/smp4-rgy-66584-4689315.pdf?src-supplier=Mouser, ComponentLink2Description=https://datasheet.ciiva.com/22655/1825802-22655989.pdf?src-supplier=Element14, ComponentLink2URL=https://datasheet.ciiva.com/22655/1825802-22655989.pdf?src-supplier=Element14, ComponentLink3Description=https://datasheet.ciiva.com/16488/smp4-rgy-16488225.pdf?src-supplier=Future+Electronics, ComponentLink3URL=https://datasheet.ciiva.com/16488/smp4-rgy-16488225.pdf?src-supplier=Future+Electronics, ComponentLink4Description=https://datasheet.ciiva.com/2112/smp4-rgy-2112236.pdf?src-supplier=Digi-Key, ComponentLink4URL=https://datasheet.ciiva.com/2112/smp4-rgy-2112236.pdf?src-supplier=Digi-Key, ComponentLink5Description=https://datasheet.ciiva.com/2112/smp4-rgy-2112238.pdf?src-supplier=Digi-Key, ComponentLink5URL=https://datasheet.ciiva.com/2112/smp4-rgy-2112238.pdf?src-supplier=Digi-Key, ComponentLink6Description=https://datasheet.ciiva.com/48979/70536505-48979515.pdf?src-supplier=Allied+Electronics, ComponentLink6URL=https://datasheet.ciiva.com/48979/70536505-48979515.pdf?src-supplier=Allied+Electronics, ComponentLink7Description=https://datasheet.ciiva.com/2112/smp4-rgy-2112237.pdf?src-supplier=Digi-Key, ComponentLink7URL=https://datasheet.ciiva.com/2112/smp4-rgy-2112237.pdf?src-supplier=Digi-Key, Dominant Wavelength=585nm, Height=1.85mm, Illumination Color=Green,Red,Yellow, Lead Free="Lead Free", Length=3.2mm, Lens Style=Clear,Round, Lens Transparency=Clear, Luminous Intensity=16mcd, Manufacturer Part Number=SMP4-RGY, Mount="Surface Mount", Number of Pins=4, Packaging="Tape and Reel", REACH SVHC=Unknown, RoHS=Yes, RoHS Compliant=Yes, Series=-, Supplier 1=Newark, Test Current=20mA, Viewing Angle=120°, Width=2.8mm

## Via types
v1: diameter 1.27, hole 0.711, Top Layer to Bottom Layer, 30 vias
v2: diameter 1.27 (per signal layer), hole 0.711, Top Layer to Power, 1 vias

## Nets (pads, with @x,y where several pads share a name; then routed paths per layer and width w, separated by ;. In a path a pad name is that pad's centre, name@x,y a point inside that pad or via, vN(x,y) a via of type N, cw(c..) or ccw(c..) an arc to the next point about the centre after c; other vN are vias at no path point)
+3V3: C105.2 C300.2 C400.2 C401.2 R100.2 R300.2 R301.2 R400.2 R401.2 R600.2 R601.2 R602.2 TP102.1 TP304.1 TP306.1 U100.33 U100.34 U300.19 U400.1 U400.4 | length 50.4
  Top Layer w0.2: U400.1 43.275,-23.775 43.275,-23.367 43.392,-23.25 44.496,-23.25 44.75,-23.504 U400.4 ; R401.2 R400.2
  Top Layer w0.254: C401.2 44.7,-24.6 44.8,-24.5 44.8,-23.85 U400.4
  Top Layer w0.5: v1(49.8,-5.2) 77.2,-5.2 v2(79.7,-2.7) ; R301.2 85,-21 ; v1(84.95,-13.75) 85,-13.8 85,-21 ; R300.2 85,-21
  Bottom Layer w0.2: TP306.1 48,-4.6 v1(50.7,-1.9)
  other v1: 91,-7.5 90.9,-4.1 32.8,-3.6
AC1: C100.1 U100.16 X100.1 | length 46.2
  Top Layer w0.254: X100.1 3,-1.9 5.4,0.5 34.099,0.5 35.899,2.3 39.971,2.3 40.6,1.671 40.6,0.4 U100.16 41.35,1.2 C100.1
AC2: C101.1 U100.19 X100.2 | length 47.3
  Top Layer w0.254: X100.2 3.122,-6.918 3.982,-6.918 4.6,-6.3 4.6,-0.9 5.6,0.1 34.2,0.1 36.027,1.927 39.223,1.927 39.223,0.277 U100.19 C101.1
ANTIN: C302.2 L300.2 U300.17 | length 4.3
  Bottom Layer w0.2: L300.2@37.7,-3.6 L300.2 ; U300.17 U300.17@39,-4.9
  Bottom Layer w0.254: C302.2 37.7,-2.3 L300.2@37.7,-3.6 ; L300.2 U300.17@39,-4.9
ANTOUT: C301.2 L300.1 U300.16 | length 3.4
  Bottom Layer w0.254: C301.2 37.2,-4.1 L300.1 38.678,-5.578 U300.16
DI_PB_1: PB300.1 R302.2 U300.9 | length 72.7
  Top Layer w0.254: v1(50.3,-11.3) 50.3,-9.003 51.751,-7.551 76.451,-7.551 76.9,-8.001 76.9,-12.3 v1(77,-12.4) ; v1(80.9,-13.8) 82.1,-12.6 86.4,-12.6 87.4,-13.6 R302.2 87.425,-19.025 89.025,-19.025 PB300.1@90.975,-19.025
  Bottom Layer w0.254: U300.9 39.9,-12.6 41.5,-14.2 51,-14.2 51.2,-14 51.2,-12.2 v1(50.3,-11.3) ; v1(77,-12.4) 78.4,-13.8 v1(80.9,-13.8)
DI_PB_2: PB301.1 R303.2 U300.8 | length 61.7
  Top Layer w0.254: v1(50.2,-13.2) 49.2,-12.2 49.2,-10.501 49.408,-10.293 49.408,-9.394 51.648,-7.154 76.554,-7.154 79,-9.6 79,-19 79.025,-19.025 80.975,-19.025 81,-19 R303.2
  Bottom Layer w0.254: U300.8 40.55,-12.45 41.9,-13.8 49.3,-13.8 49.586,-13.514 49.611,-13.514 49.925,-13.2 v1(50.2,-13.2)
GND: C102.2 C103.2 C104.2 C105.1 C300.1 C301.1 C302.1 C400.1 C401.1 R101.1 R102.1 R302.1 R303.1 TP101.1 TP103.1 TP303.1 TP305.1 U100.2 U100.3 U100.26 U100.32 U100.35 U100.40 U100.44 U300.15 U300.18 U300.20 U400.2 U400.5 U600.3 X101.2 | length 5.7
  Top Layer w0.254: C400.1 43.75,-24.85 U400.2
  Bottom Layer w0.254: 43.7,-1.2 43.9,-1.4 47.2,-1.4 47.5,-1.7 47.5,-1.8
  other v1: 44.1,-26.4 83.5,-8.6
I2C_SCL: R401.1 U300.25 U400.10 | length 13.5
  Top Layer w0.254: U400.10 44.25,-19.75 R401.1 43.3,-19.1 42.5,-18.3 42.5,-14.2 v1(45.2,-11.5)
  Bottom Layer w0.254: v1(45.2,-11.5) 45.2,-10.9 46,-10.1 U300.25
I2C_SDA: R400.1 U300.24 U400.11 | length 32.9
  Top Layer w0.254: U400.11 43.602,-20.6 43.602,-20.156 43.469,-20.023 43.031,-20.023 41.823,-21.231 41.823,-23.169 42.898,-24.244 42.898,-27.151 43.047,-27.3 46.028,-27.3 46.177,-27.151 46.177,-21.176 44.5,-19.5 R400.1 44.95,-19.1 46.062,-17.988 46.062,-11.257 v1(46.543,-10.776)
  Bottom Layer w0.254: U300.24 46.121,-8.827 46.527,-9.233 46.527,-10.76 v1(46.543,-10.776)
ILIM: R102.2 U100.25 | length 1.5
  Top Layer w0.254: R102.2 35.8,-1 U100.25
LED_G: R601.1 U300.6 U600.1 | length 50.5
  Top Layer w0.254: v1(47.2,-12.5) 48.094,-11.606 48.094,-10.656 48.408,-10.342 48.408,-10.292 48.7,-10 48.7,-9.101 51.401,-6.4 80.674,-6.4 81.274,-7 v1(81.3,-7)
  Bottom Layer w0.254: U300.6 41.85,-12.15 42.792,-13.092 46.566,-13.092 47.158,-12.5 v1(47.2,-12.5) ; v1(81.3,-7) U600.1@83.2,-5.1 ; R601.1 U600.1@83.2,-5.1 ; U600.1 83.3,-5 U600.1@83.2,-5.1
LED_R: R600.1 U300.7 U600.2 | length 59.6
  Top Layer w0.254: v1(48.5,-12.938) 48.694,-12.744 48.694,-12.349 48.762,-12.281 48.762,-10.439 49.054,-10.147 49.054,-9.247 51.501,-6.8 78.3,-6.8 v1(79.6,-8.1)
  Bottom Layer w0.254: U300.7 41.2,-12.2 42.446,-13.446 47.843,-13.446 48.351,-12.938 v1(48.5,-12.938) ; v1(79.6,-8.1) 79.6,-4.3 80.4,-3.5 85.05,-3.5 U600.2 86.65,-4.9 R600.1
LED_Y: R602.1 U300.5 U600.4 | length 60.7
  Top Layer w0.254: v1(47.6,-9.7) 51.3,-6 90.9,-6 v1(91,-5.9)
  Bottom Layer w0.254: U300.5 42.5,-12 43.231,-12.731 45.749,-12.731 46.843,-11.638 47.187,-11.638 47.436,-11.389 47.436,-9.864 v1(47.6,-9.7) ; U600.4 U600.4@86.85,-6.5 ; R602.1 88,-6.5 U600.4@86.85,-6.5 ; v1(91,-5.9) 87.322,-5.9 87.173,-6.049 87.173,-6.177 U600.4@86.85,-6.5
NetC100_2: C100.2 U100.13 U100.14 U100.15 | length 2.7
  Top Layer w0.254: U100.15 U100.14 ; C100.2 42.85,1.2 U100.14 ; U100.13 U100.14
NetC101_2: C101.2 U100.22 U100.23 U100.24 | length 2.7
  Top Layer w0.254: U100.24 U100.23 ; C101.2 U100.23 ; U100.22 U100.23
NetC102_1: C102.1 U100.36 | length 1.4
  Top Layer w0.254: C102.1 U100.36
NetC103_1: C103.1 U100.1 | length 1.4
  Top Layer w0.254: U100.1 44.7,-6.5 44.8,-6.6 C103.1
NetC104_1: C104.1 U100.4 | length 1.5
  Top Layer w0.254: U100.4 44.8,-5 45,-5.2 C104.1
NetL301_1: L301.1 L302.1 | length 1.8
  Bottom Layer w0.2: L301.1 48.2,-7.4 L302.1
NetL301_2: L301.2 U300.21 | length 1.6
  Bottom Layer w0.254: U300.21 46.022,-6.9 46.551,-6.9 46.7,-6.751 46.7,-6.7 47.027,-6.373 47.077,-6.373 47.2,-6.25 L301.2
NetL302_2: L302.2 U300.22 | length 1.5
  Bottom Layer w0.254: U300.22 46.073,-7.6 46.7,-7.6 46.9,-7.8 L302.2
NetPB300_2: PB300.2 R300.1 | length 3.6
  Top Layer w0.254: R300.1 89,-21 89.025,-20.975 PB300.2@90.975,-20.975
NetPB301_2: PB301.2 R301.1 | length 3.6
  Top Layer w0.254: PB301.2@79.025,-20.975 80.975,-20.975 82.575,-20.975 R301.1
NetR100_1: R100.1 R101.2 U100.12 | length 3.4
  Top Layer w0.254: U100.12 44.704,-0.3 R101.2 R100.1
RESET: TP301.1 U300.13 | length 3.7
  Bottom Layer w0.254: TP301.1 36.4,-8.7 37.4,-8.7 38.573,-7.527 U300.13
RX_N: U100.43 U200.4 | length 45.7
  Top Layer w0.254: U200.4 11,-1.8 11.6,-2.4 11.6,-5.55 12.6,-6.55 30.922,-6.55 v1(32.772,-8.4) ; v1(34.1,-13.5) 34.294,-13.306 34.699,-13.306 39.923,-8.081 40.219,-8.081 40.706,-7.594 40.706,-7.524 40.708,-7.522 40.708,-7.513 40.85,-7.371 U100.43
  Bottom Layer w0.254: v1(32.772,-8.4) 34.1,-8.4 35.362,-9.662 35.362,-12.057 34.857,-12.562 34.388,-12.562 34.24,-12.711 34.24,-13.36 v1(34.1,-13.5)
RX_P: U100.42 U200.3 | length 39.5
  Top Layer w0.254: U200.3 8.983,-4.263 11.1,-6.38 12.32,-7.6 30.335,-7.6 v1(32.735,-10) ; v1(32.8,-12.4) 33.981,-12.4 34.143,-12.562 34.942,-12.562 39.777,-7.727 40.069,-7.727 40.202,-7.594 40.202,-7.523 40.354,-7.371 U100.42
  Bottom Layer w0.254: v1(32.735,-10) 32.735,-12.335 v1(32.8,-12.4)
SPI_CLK: U100.47 U300.3 | length 7.7
  Top Layer w0.254: v1(42.8,-5.7) 42.85,-5.75 U100.47
  Bottom Layer w0.254: v1(42.8,-5.7) 42.864,-5.764 43.664,-5.764 44.8,-6.9 44.8,-9.047 44.327,-9.521 44.206,-9.521 44.073,-9.653 44.073,-9.726 43.924,-9.875 43.823,-9.875 43.8,-9.898 U300.3
SPI_EN: U100.48 U300.4 | length 3.5
  Top Layer w0.254: U100.48 43.35,-8.043 43.9,-8.593 v1(43.9,-8.7)
  Bottom Layer w0.254: U300.4 43.15,-9.258 43.708,-8.7 v1(43.9,-8.7)
SPI_SIMO: U100.45 U300.1 | length 12.1
  Top Layer w0.254: v1(40.4,-5.6) 40.573,-5.773 41.569,-5.773 41.796,-6 41.8,-6 41.85,-6.05 U100.45
  Bottom Layer w0.254: v1(40.4,-5.6) 41.681,-5.6 42.443,-4.838 43.239,-4.838 45.154,-6.753 45.154,-9.194 44.827,-9.521 44.827,-9.775 U300.1
SPI_SOMI: U100.46 U300.2 | length 6.9
  Top Layer w0.254: U100.46 42.35,-10.25 v1(43.7,-11.6)
  Bottom Layer w0.254: v1(43.7,-11.6) 44.45,-10.85 U300.2
SWD_CLK: TP300.1 U300.12 | length 2.4
  Bottom Layer w0.254: TP300.1 38.4,-8.8 38.4,-8.4 38.622,-8.178 U300.12
SWD_IO: TP302.1 U300.14 | length 2.1
  Bottom Layer w0.254: TP302.1 37.7,-7.6 38.423,-6.877 U300.14
TX_N: U100.38 U200.1 | length 32
  Top Layer w0.254: U200.1 29.3,-9.8 30.9,-11.4 32.415,-11.4 32.464,-11.449 33.452,-11.449 34.079,-10.822 34.976,-10.822 38.203,-7.594 38.203,-7.518 38.35,-7.371 U100.38
TX_P: U100.39 U200.2 | length 35.6
  Top Layer w0.254: U200.2 29.819,-8.303 32.611,-11.095 33.305,-11.095 v1(34.44,-9.96) ; v1(34.5,-11.7) 34.6,-11.7 38.85,-7.45 U100.39
  Bottom Layer w0.254: v1(34.44,-9.96) 34.44,-10.176 34,-10.616 34,-11.043 34.5,-11.543 v1(34.5,-11.7)
VBAT: TP100.1 U100.5 X101.1 | length 6.8
  Top Layer w0.254: U100.5 44.625,-2.625 TP100.1 45.519,-3.281 46.019,-3.281 46.2,-3.1 47.65,-3.1 47.95,-3.4 48.8,-3.4 X101.1
pads on no net: MTH100.MTH_2mmx2mm MTH101.MTH_2mmx3.5mm MTH102.MTH_2mmx3.5mm U100.37 U100.41 U300.10 U300.11 U300.23 U300.26 U300.27 U400.3 U400.6 U400.7 U400.8 U400.9 U400.12 U400.13 U400.14 U400.15 U400.16 U400.17

## Polygon pours and split planes (outlines as drawn)
GND on Bottom Layer "GND_L04_P010" (solid, pour order 10): 32,1.5 32.2,1.5 32.5,1.8 32.5,2.5 51.5,2.5 51.5,-2.7 51.8,-3 52,-3 52,-9 51.8,-9 51.5,-9.3 51.5,-14.5 47.8,-14.5 47.5,-14.8 47.5,-15 40.5,-15 40.5,-14.8 40.2,-14.5 32.5,-14.5 32.5,-13.8 32.2,-13.5 32,-13.5
+3V3 on Bottom Layer "+3V3_L04_P007" (solid, pour order 7): 45.1,-3.8 45.2,-3.8 51.4,-3.8 51.4,-5.8 48.55,-5.8 45.1,-5.9
+3V3 on Bottom Layer "+3V3_L04_P000" (solid, pour order 0): 32,-1.9 34.9,-1.9 34.9,-3.658 34.946,-3.704 36.254,-3.704 36.3,-5.4 36.2,-5.4 32,-5.4
+3V3 on Bottom Layer "+3V3_L04_P005" (solid, pour order 5): 35.996,-5.796 36.704,-5.796 36.85,-5.65 36.85,-4.95 38.373,-4.95 38.7,-5.277 38.7,-5.8 39.53,-5.8 39.5,-5.77 39.5,-1.7 36.1,-1.7 36,-1.6
+3V3 on Bottom Layer "+3V3_L04_P004" (solid, pour order 4): 78.7,-5.8 85.2,-5.8 85.2,-8.4 95.5,-8.4 95.5,2.5 78.7,2.5
GND on Bottom Layer "GND_L04_P011" (solid, pour order 11): 74,-3 74.2,-3 74.5,-2.7 74.5,2.5 95.5,2.5 95.5,-14.5 93.8,-14.5 93.5,-14.8 93.5,-22.5 76.5,-22.5 76.5,-14.8 76.2,-14.5 74.5,-14.5 74.5,-9.3 74.2,-9 74,-9
GND on Top Layer "GND_L01_P012" (solid, pour order 12): -2.5,1.5 32.2,1.5 32.5,1.8 32.5,2.5 51.5,2.5 51.5,-2.7 51.8,-3 74.2,-3 74.5,-2.7 74.5,2.5 95.5,2.5 95.5,-14.5 93.8,-14.5 93.5,-14.8 93.5,-22.5 76.5,-22.5 76.5,-14.8 76.2,-14.5 74.5,-14.5 74.5,-9.3 74.2,-9 51.8,-9 51.5,-9.3 51.5,-14.5 47.8,-14.5 47.5,-14.8 47.5,-27.5 40.5,-27.5 40.5,-14.8 40.2,-14.5 32.5,-14.5 32.5,-13.8 32.2,-13.5 -2.5,-13.5
+3V3 on Top Layer "+3V3_L01_P006" (solid, pour order 6): 45.8,-1.2 51.5,-1.2 51.5,-6.6 47.6,-6.6 47.6,-5.8 47.6,-3 45.8,-3
+3V3 on Power (split plane): 51.49,-2.5 51.499,-2.6 51.528,-2.695 51.576,-2.784 51.639,-2.861 51.716,-2.924 51.805,-2.972 51.9,-3.001 52,-3.01 52,-8.99 51.9,-8.999 51.805,-9.028 51.716,-9.076 51.639,-9.139 51.576,-9.216 51.528,-9.305 51.499,-9.4 51.49,-9.5 51.49,-14.49 48,-14.49 47.9,-14.499 47.805,-14.528 47.716,-14.576 47.639,-14.639 47.576,-14.716 47.528,-14.805 47.499,-14.9 47.49,-15 40.51,-15 40.501,-14.9 40.472,-14.805 40.424,-14.716 40.361,-14.639 40.284,-14.576 40.195,-14.528 40.1,-14.499 40,-14.49 32.51,-14.49 32.51,-14 32.501,-13.9 32.472,-13.805 32.424,-13.716 32.361,-13.639 32.284,-13.576 32.195,-13.528 32.1,-13.499 32,-13.49 32,1.49 32.1,1.499 32.195,1.528 32.284,1.576 32.361,1.639 32.424,1.716 32.472,1.805 32.501,1.9 32.51,2 32.51,2.49 51.49,2.49
+3V3 on Power (split plane): 95.49,-14.49 94,-14.49 93.9,-14.499 93.805,-14.528 93.716,-14.576 93.639,-14.639 93.576,-14.716 93.528,-14.805 93.499,-14.9 93.49,-15 76.51,-15 76.501,-14.9 76.472,-14.805 76.424,-14.716 76.361,-14.639 76.284,-14.576 76.195,-14.528 76.1,-14.499 76,-14.49 74.51,-14.49 74.51,-9.5 74.501,-9.4 74.472,-9.305 74.424,-9.216 74.361,-9.139 74.284,-9.076 74.195,-9.028 74.1,-8.999 74,-8.99 74,-3.01 74.1,-3.001 74.195,-2.972 74.284,-2.924 74.361,-2.861 74.424,-2.784 74.472,-2.695 74.501,-2.6 74.51,-2.5 74.51,2.49 95.49,2.49
GND on Ground (split plane): 95.49,-14.49 94,-14.49 93.9,-14.499 93.805,-14.528 93.716,-14.576 93.639,-14.639 93.576,-14.716 93.528,-14.805 93.499,-14.9 93.49,-15 93.49,-22.49 76.51,-22.49 76.51,-15 76.501,-14.9 76.472,-14.805 76.424,-14.716 76.361,-14.639 76.284,-14.576 76.195,-14.528 76.1,-14.499 76,-14.49 74.51,-14.49 74.51,-9.5 74.501,-9.4 74.472,-9.305 74.424,-9.216 74.361,-9.139 74.284,-9.076 74.195,-9.028 74.1,-8.999 74,-8.99 52,-8.99 51.9,-8.999 51.805,-9.028 51.716,-9.076 51.639,-9.139 51.576,-9.216 51.528,-9.305 51.499,-9.4 51.49,-9.5 51.49,-14.49 48,-14.49 47.9,-14.499 47.805,-14.528 47.716,-14.576 47.639,-14.639 47.576,-14.716 47.528,-14.805 47.499,-14.9 47.49,-15 47.49,-27.49 40.51,-27.49 40.51,-15 40.501,-14.9 40.472,-14.805 40.424,-14.716 40.361,-14.639 40.284,-14.576 40.195,-14.528 40.1,-14.499 40,-14.49 32.51,-14.49 32.51,-14 32.501,-13.9 32.472,-13.805 32.424,-13.716 32.361,-13.639 32.284,-13.576 32.195,-13.528 32.1,-13.499 32,-13.49 -2.49,-13.49 -2.49,1.49 32,1.49 32.1,1.499 32.195,1.528 32.284,1.576 32.361,1.639 32.424,1.716 32.472,1.805 32.501,1.9 32.51,2 32.51,2.49 51.49,2.49 51.49,-2.5 51.499,-2.6 51.528,-2.695 51.576,-2.784 51.639,-2.861 51.716,-2.924 51.805,-2.972 51.9,-3.001 52,-3.01 74,-3.01 74.1,-3.001 74.195,-2.972 74.284,-2.924 74.361,-2.861 74.424,-2.784 74.472,-2.695 74.501,-2.6 74.51,-2.5 74.51,2.49 95.49,2.49